# Altium PCB pcb_vidor_shield_memestransductor.PcbDoc
Units mil, origin at the board's own origin, x right, y up, seen from the top; angles counter-clockwise.
Board outline 3267.21 x 981.95 mil, 2 copper layers (Top Layer, Bottom Layer); 1 components, 0 nets, 14 pads, 0 vias.
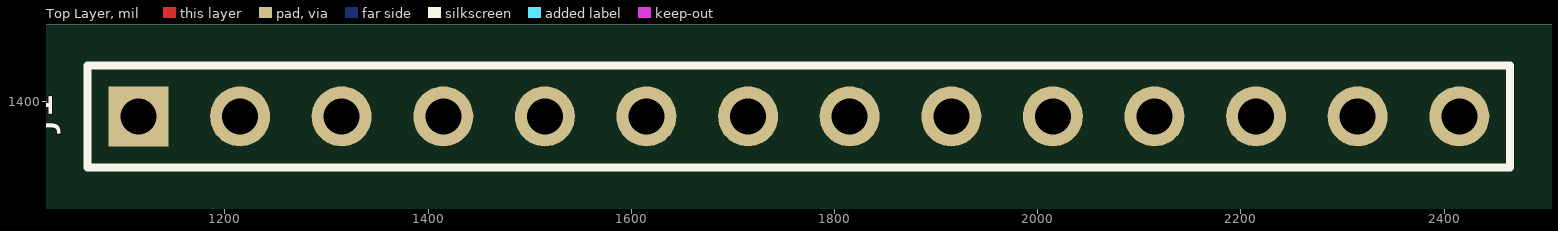
[diagram p0: Top Layer view]
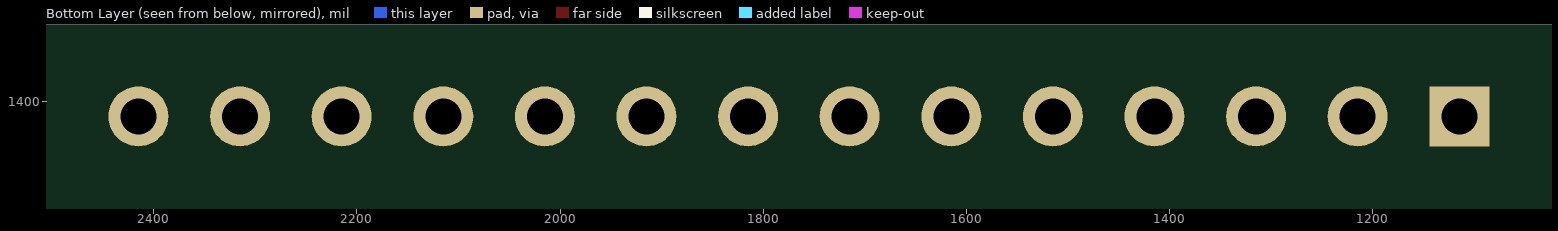
[diagram p1: Bottom Layer view, seen from below]

## Layer stack, top to bottom
Top Solder: solder mask 0.4, Solder Resist, Dk 3.5
Top Layer: signal copper 1.4
Dielectric 1: dielectric 12.6, FR-4, Dk 4.8
Bottom Layer: signal copper 1.4
Bottom Solder: solder mask 0.4, Solder Resist, Dk 3.5

## Board outline
295.42,506.24 ccw(c338.58,583.11) 338.58,494.95 2527.29,494.95 2527.29,575.4 cw(c2578.64,575.4) 2630,575.4 2630,494.95 3517.63,494.95 3517.63,804.88 3390.23,804.88 cw(c3390.23,805.15) 3390.2,804.88 cw(c3390.17,805.15) 3390.17,804.88 cw(c3390.17,834.62) 3390.17,864.37 cw(c3390.17,864.1) 3390.2,864.36 cw(c3390.23,864.1) 3390.23,864.37 3517.63,864.37 3517.63,1476.9 2630,1476.9 2630,1396.6 cw(c2578.64,1396.6) 2527.29,1396.6 2527.29,1476.9 338.58,1476.9 ccw(c338.58,1388.75) 250.42,1388.75 250.42,583.11 ccw(c338.58,583.11) 294.89,506.54 294.89,558.5 cw(c295.15,558.5) 295.42,558.5

## Design rules (kind name [scope] priority, off if disabled: settings)
Clearance [All] p1: gap=10 ignorepadtopadclearanceinfootprint=FALSE except(0: Arc-Hole Track-Hole SMDPad-Hole THPad-Hole Via-Hole Fill-Hole Poly-Hole Region-Hole Text-Hole)
PolygonConnect [All] p1: connectstyle=Relief reliefconductorwidth=10 reliefentries=4 polygonreliefangle="90 Angle" airgapwidth=10
RoutingVias [All] p1: holewidth=28 width=50 viastyle="Through Hole" minholewidth=28 minwidth=50 maxholewidth=28 maxwidth=50
SolderMaskExpansion [All] p1: expansion=4
Width [All] p1: maxlimit=10 minlimit=10 preferedwidth=10
30 further rules are at their usual default settings.

## Components (designator, comment, footprint, x,y, rotation, side; value= is the part's Value field where it differs from the comment)
J1 "Comment" HDR1X14 1115,1385 r0 top

## Footprints (in the part's own frame and the unit in brackets; to place one, negate y for a bottom-side part, rotate by r counter-clockwise, add the part's x,y. Pads: shape width x height; smd on the part's side, far side on the other; paste and mask are expansions set on the pad)
HDR1X14 [mm] "Connector; Header; 14 Position"
  rect 1.5x1.5 hole 0.9: 1(0,0)
  round 1.5 hole 0.9: 2(2.54,0) 3(5.08,0) 4(7.62,0) 5(10.16,0) 6(12.7,0) 7(15.24,0) 8(17.78,0) 9(20.32,0) 10(22.86,0) 11(25.4,0) 12(27.94,0) 13(30.48,0) 14(33.02,0)
  silkscreen extent -1.27,-1.27 34.29,1.27

## Nets (pads, with @x,y where several pads share a name; then routed paths per layer and width w, separated by ;. In a path a pad name is that pad's centre, name@x,y a point inside that pad or via, vN(x,y) a via of type N, cw(c..) or ccw(c..) an arc to the next point about the centre after c; other vN are vias at no path point)
pads on no net: J1.1 J1.2 J1.3 J1.4 J1.5 J1.6 J1.7 J1.8 J1.9 J1.10 J1.11 J1.12 J1.13 J1.14

## Silkscreen, mask and mechanical layers (free items; w line width, h text height)
Mechanical 1:
  region: 2728.16,33.07 2629.73,49.46 2728.16,65.85
  region: 2527.55,49.46 2429.13,33.07 2429.13,65.85
  region: 480.42,147.63 382,164.02 480.42,180.4
  region: 295.15,164.02 196.73,147.63 196.73,180.4
  region: 3903.03,494.69 3886.64,593.11 3919.42,593.11
  region: 3919.42,1378.74 3886.64,1378.74 3903.03,1477.17
  region: 3517.89,1703.47 3419.47,1687.08 3419.47,1719.86
  region: 348.58,1687.08 250.15,1703.47 348.58,1719.86
  lines w0.5: 98.3,164.02 578.85,164.02 ; 250.15,1413.35 250.15,1752.68 ; 250.15,1703.47 3517.89,1703.47 ; 295.15,114.8 295.15,558.5 ; 382,114.8 382,558.5 ; 2330.7,49.46 2826.58,49.46 ; 2527.55,0.25 2527.55,470.08 ; 2629.73,0.25 2629.73,470.08 ; 3517.89,1501.77 3517.89,1752.68 ; 3542.5,494.69 3952.24,494.69 ; 3542.5,1477.17 3952.24,1477.17 ; 3903.03,494.69 3903.03,1477.17
  text "83.0" at 1769.19,1728.07 h98.43
  text "25.0" at 3714.38,936.71 h98.43 r90
  text "2.2" at 406.6,188.62 h98.43
  text "2.6" at 2654.34,74.07 h98.43
Mechanical 3:
  lines w0.5: 2676.89,496.65 3069.88,496.65 ; 3370.61,520.05 3372.29,517.34 ; 3390.17,805.15 cw(c3390.17,834.62) 3390.17,864.1 ; 250.15,583.11 ccw(c338.58,583.11) 338.58,494.69 2527.55,494.69 2527.55,575.4 cw(c2578.64,575.4) 2629.73,575.4 2629.73,494.69 3517.89,494.69 3517.89,805.15 3390.23,805.15 cw(c3390.18,834.62) 3390.23,864.1 3517.89,864.1 3517.89,1477.17 2629.73,1477.17 2629.73,1396.6 cw(c2578.64,1396.6) 2527.55,1396.6 2527.55,1477.17 338.58,1477.17 ccw(c338.58,1388.75) 250.15,1388.75 250.15,583.11 ; 295.15,583.11 cw(c338.58,583.11) 382,583.11 cw(c338.58,583.11) 295.15,583.11 ; 295.15,1388.75 cw(c338.58,1388.75) 382,1388.75 cw(c338.58,1388.75) 295.15,1388.75 ; 1065.52,536.74 1065.52,636.56 2463,636.56 2463,536.74 1065.52,536.74 ; 1065.52,1335.3 2463,1335.3 2463,1435.12 1065.52,1435.12 1065.52,1335.3